# Altium PCB PCB2.PcbDoc
Units mil, origin at the board's own origin, x right, y up, seen from the top; angles counter-clockwise.
Board outline 1705 x 900 mil, 2 copper layers (Top Layer, Bottom Layer); 12 components, 10 nets, 29 pads, 0 vias.
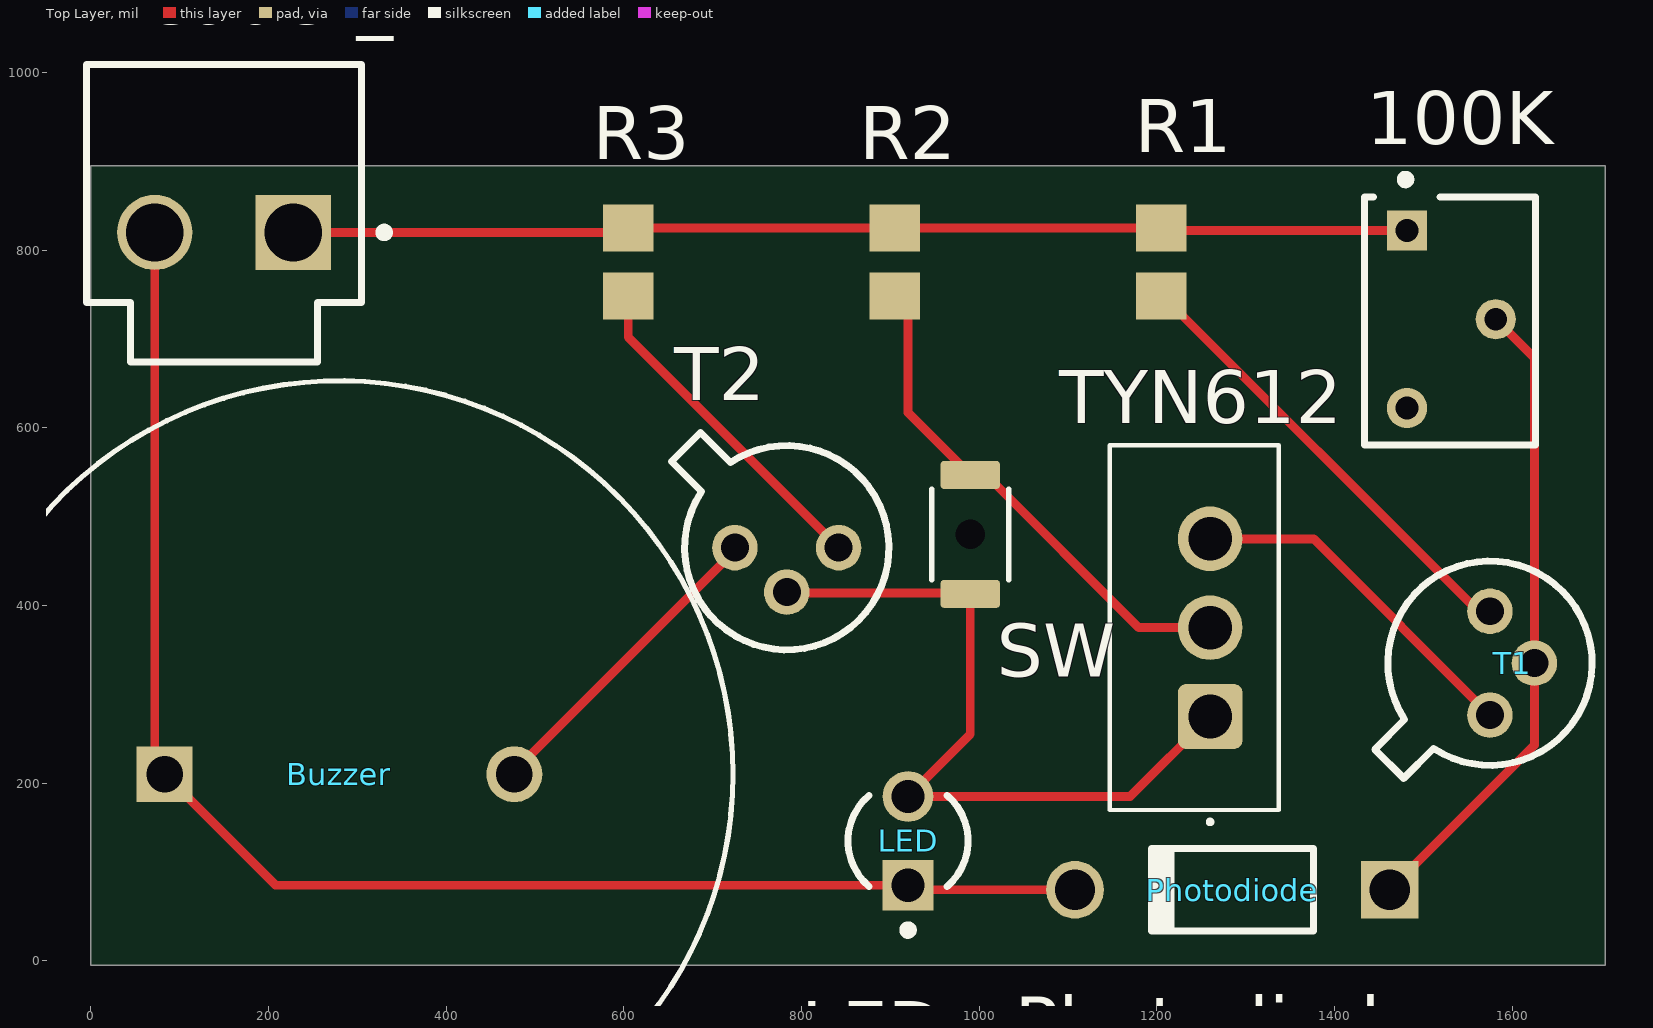
[diagram p0: Top Layer view]
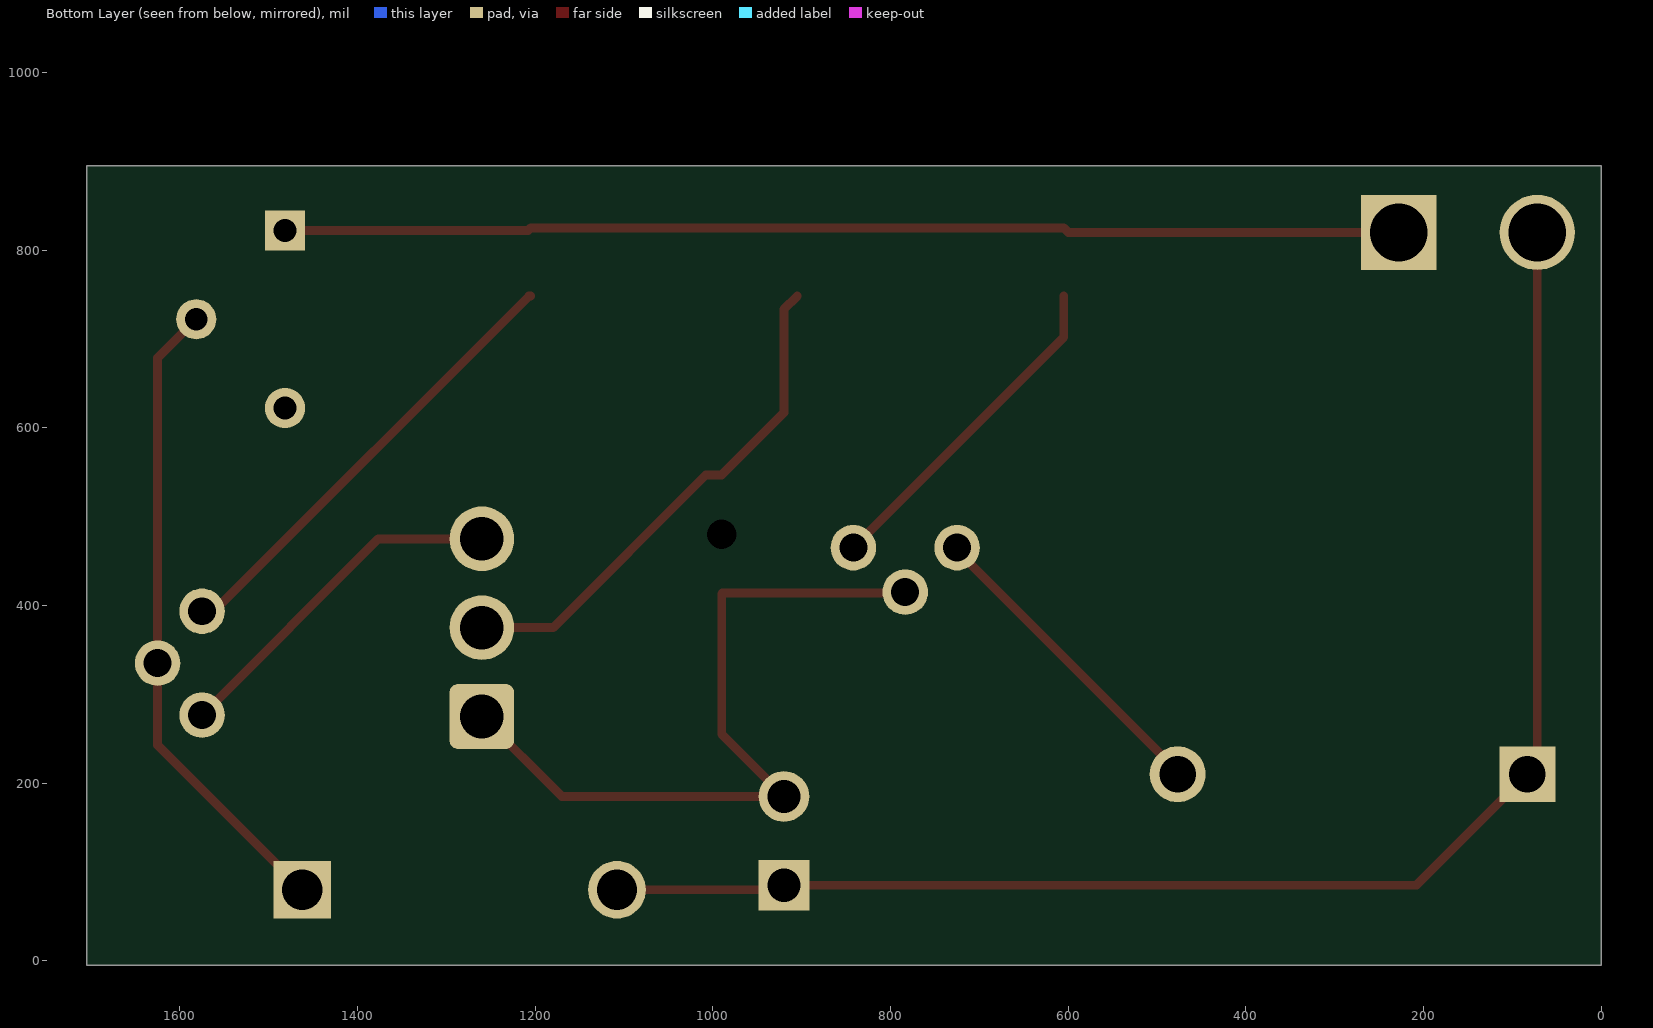
[diagram p1: Bottom Layer view, seen from below]
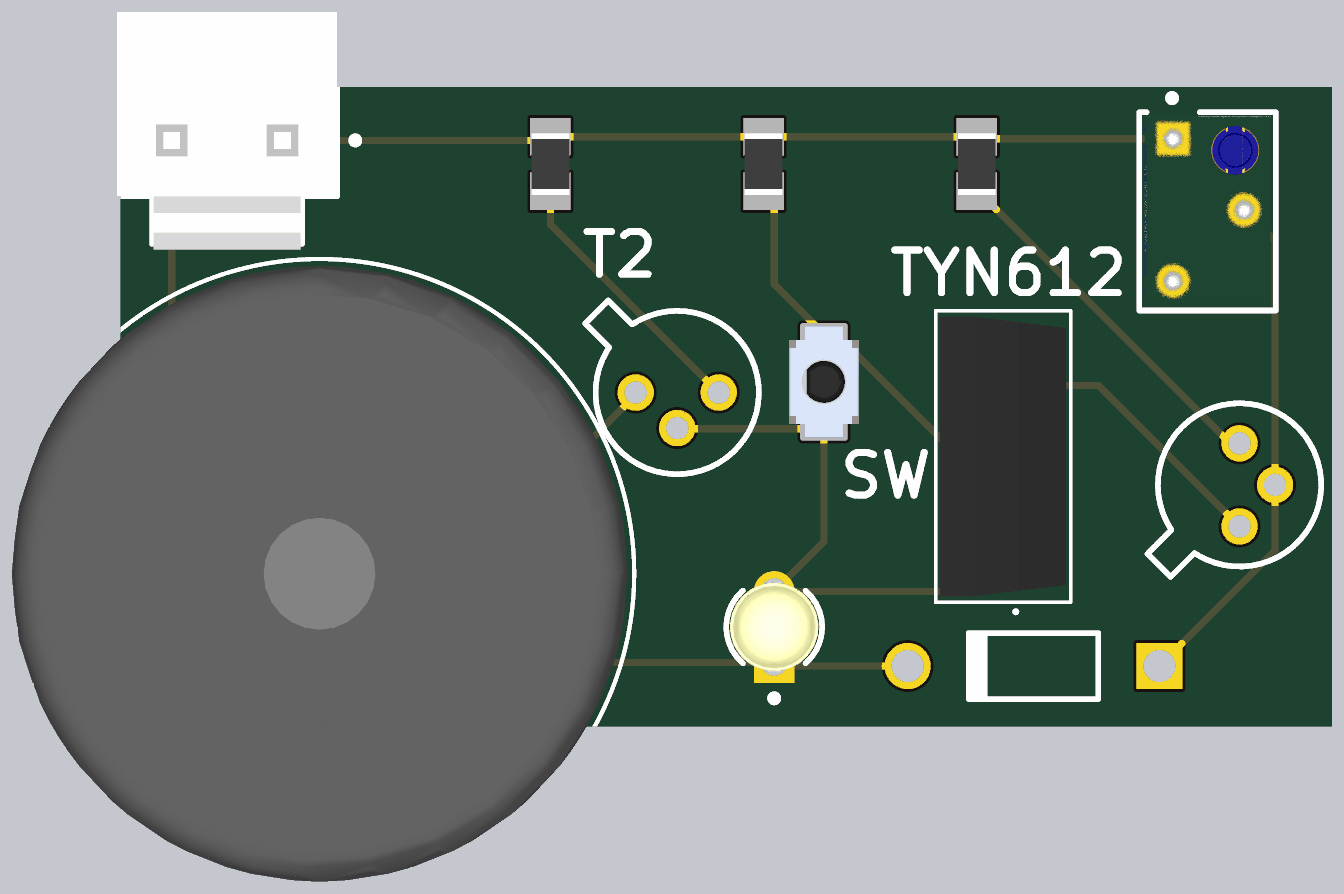
[diagram p2: 3D render of the assembled board from above, using the file's embedded part models]

## Layer stack, top to bottom
Top Solder: solder mask 0.4, Solder Resist, Dk 3.5
Top Layer: signal copper 1.4
Dielectric 1: dielectric 12.6, FR-4, Dk 4.8
Bottom Layer: signal copper 1.4
Bottom Solder: solder mask 0.4, Solder Resist, Dk 3.5

## Board outline
0,-5 1705,-5 1705,895 0,895

## Design rules (kind name [scope] priority, off if disabled: settings)
Clearance [All] p1: gap=10 ignorepadtopadclearanceinfootprint=FALSE
PolygonConnect [All] p1: connectstyle=Relief reliefconductorwidth=10 reliefentries=4 polygonreliefangle="90 Angle" airgapwidth=10
RoutingVias [All] p1: holewidth=28 width=50 viastyle="Through Hole" minholewidth=28 minwidth=50 maxholewidth=28 maxwidth=50
SolderMaskExpansion [All] p1: expansion=4 istentingtop=FALSE
Width [All] p1: maxlimit=10 minlimit=10 preferedwidth=10
30 further rules are at their usual default settings.

## Components (designator, comment, footprint, x,y, rotation, side; value= is the part's Value field where it differs from the comment)
100K "Potentiometer" FP-3266W-MFG 1530,720 r270 top value=100kΩ
Buzzer "Buzzer" FP-PKM22EPPH4001-B0-MFG 280,210 r0 top
Header_2 "B2P-VH(LF)(SN)" JST-B2P-VH(LF)(SN)_V 150,875 r180 top
LED "LED" FP-HLMP-1719-MFG 920,135 r90 top
Photodiode "1N4001" DIOD-DO-41-P-2_V 1285,80 r180 top
R1 "Resistor 1k +/-1% 0805 125 mW" RESC2013X70X40ML20T20 1205,786.61 r90 top value=1k
R2 "Resistor 1k +/-1% 0805 125 mW" RESC2013X70X40ML20T20 905,786.61 r90 top value=1k
R3 "Resistor 1k +/-1% 0805 125 mW" RESC2013X70X40ML20T20 605,786.61 r90 top value=1k
SW "" OMRON-B3U-1000P-2-B_V 990,480 r90 top
T1 "2N2222" MLTC-TO-18-3 1575,335 r90 top
T2 "2N2222" MLTC-TO-18-3 783.46,465 r0 top
TYN612 "TYN612" SIP450W75P254L1000H1920Q3_PRSS0003AF-A_N 1242.28,375 r90 top

## Footprints (in the part's own frame and the unit in brackets; to place one, negate y for a bottom-side part, rotate by r counter-clockwise, add the part's x,y. Pads: shape width x height; smd on the part's side, far side on the other; paste and mask are expansions set on the pad)
DIOD-DO-41-P-2_V [mm] "2-Leads, Axial Lead, Body 4.635x2.36mm, Pin Spacing 9mm"
  rect 1.65x1.65 hole 1.15: 1(-4.5,0)
  round 1.65 hole 1.15: 2(4.5,0)
  silkscreen extent -2.32,-1.18 2.32,1.18, body extent -4.93,-1.18 4.93,1.18, height 2.35
FP-3266W-MFG [mm]
  rect 1.15x1.15 hole 0.65 paste-2539.97 mask+0: 1(-2.595,-1.23)
  round 1.15 hole 0.65 paste-2539.97 mask+0: 2(-0.055,1.31) 3(2.485,-1.23)
  silkscreen extent -4.17,-2.44 3.54,2.44, body extent -3.64,-2.54 3.64,2.54, height 0.25
FP-HLMP-1719-MFG [mm]
  rect 1.45x1.45 hole 0.95 paste-2539.97 mask+0: 1(-1.27,0)
  round 1.45 hole 0.95 paste-2539.97 mask+0: 2(1.27,0)
  silkscreen extent -2.67,-1.71 1.3,1.71, body extent -2.22,-2.22 2.22,2.22, height 0.25
FP-PKM22EPPH4001-B0-MFG [mm]
  rect 1.6x1.6 hole 1.05 paste-2539.97 mask+0: 1(-5,0)
  round 1.6 hole 1.05 paste-2539.97 mask+0: 2(5,0)
  silkscreen extent -11.25,-11.25 11.25,11.25, body extent -11.35,-11.35 11.35,11.35, height 0.25
JST-B2P-VH(LF)(SN)_V [mm] "THD, 2-Leads, Body 8.5x7.86mm, Pitch 3.96mm"
  rect 2.15x2.15 hole 1.65: 1(-1.98,1.4)
  round 2.15 hole 1.65: 2(1.98,1.4)
  silkscreen extent -4.71,-3.4 3.93,5.1, body extent -3.93,-3.2 3.93,5.3, height 10.9
MLTC-TO-18-3 [mm] "TO-18, 3-Leads"
  round 1.3 hole 0.8: 1(-1.485,0) 2(0,-1.27) 3(1.485,0)
  silkscreen extent -3.29,-2.92 2.92,3.29, body extent -3.29,-2.93 2.93,3.29, height 5.33
OMRON-B3U-1000P-2-B_V [mm] "SMT, 2-Leads, Body 3x2.5mm"
  rrect25% 0.8x1.7 smd: 1(-1.7,0) 2(1.7,0)
  round 0 hole 0.85 unplated: H1(0,0)
  silkscreen extent -1.3,-1.1 1.3,1.1, body extent -2,-1.25 2,1.25, height 1.6
RESC2013X70X40ML20T20 [mm] "Chip Resistor, 2-Leads, Body 2.2x1.35mm, IPC Low Density"
  rect 1.35x1.45 smd: 1(-0.975,0) 2(0.975,0)
  body extent -1.1,-0.67 1.1,0.67, height 0.7
SIP450W75P254L1000H1920Q3_PRSS0003AF-A_N [mm] "SIP, Body Width 4.50mm, Lead Width 0.75mm, Pitch 2.54mm, Body Length 10.00mm, Height 19.20mm, IPC Medium Density"
  rrect25% 1.85x1.85 hole 1.25: 1(-2.54,-0.45)
  round 1.85 hole 1.25: 2(0,-0.45) 3(2.54,-0.45)
  silkscreen extent -5.61,-2.41 5.21,2.41, body extent -5,-2.25 5,2.25, height 19.2

## Part data
100K: library part CMP-07234-000016-1, "TRIMMER 100K OHM 0.25W PC PIN TOP", Manufacturer=Bourns, Manufacturer Part Number=3266W-1-103LF, Package=3266W, Power Rating=0.25W, Resistance=0, Temperature="-55°C to +125°C", Temperature Coefficient=100ppm/°C, Temperature Range High=+125°C, Temperature Range Low=-55°C, Tolerance=10%, Automotive=No, Category=Res, ComponentLink2Description=Datasheet, ComponentLink2URL=https://www.bourns.com/docs/Product-Datasheets/3266.pdf, Composition=Cermet, Device Class L1="Passive Components", Device Class L2=Resistors, Device Class L3="Variable Resistors and Potentiometers", Digikey Description="TRIMMER 10K OHM 0.25W PC PIN TOP", Height=9.02mm, Lead Free=Yes, Mouser Description="Trimmer Resistors - Through Hole 1/4 10Kohms 10% SQ W/Standoff Sealed", Octopart=https://octopart.com/3266w-1-103lf-bourns-81445, RoHS=TRUE, Series=3266, Standoff Height=0.43mm
Buzzer: library part CMP-2000-06903-2, "AUDIO PIEZO TRANSDUCER 30V TH", Capacitance=12nF, Frequency=4kHz, Max Operating Temperature=70°C, Max Supply Voltage=25V, Min Operating Temperature=-20°C, Nominal Input Voltage=3V, Package Quantity=900, Diameter=22mm, Height=7mm, Lead Free="Lead Free", Max Frequency=4kHz, Mount="Through Hole", Packaging=Bulk, Radiation Hardening=No, REACH SVHC="No SVHC", Self Resonant Frequency=4kHz, Termination=Solder, Voltage Rating=3V, Washable=No
Header_2: library part CMP-002-00025-2, "Male Header, Pitch 3.96 mm, 1 x 2 Position, Height 10.9 mm, Tail Length 3.7 mm, -25 to 85 degC, RoHS, Bulk", Manufacturer=JST, Max Operating Temperature=85°C, Min Operating Temperature=-25°C, Package Description="Male Header, Pitch 3.96 mm, 1 x 2 Position, Height 10.9 mm, Tail Length 3.7 mm", Case/Package=B2P-VH(LF)(SN), Connector Type=Header, Datasheet URL=http://www.jst-mfg.com/product/pdf/eng/eVH.pdf, Datasheet Version=May-16, Gender=Male, Manufacturer URL=http://www.jst.com/home2.html, Mounting Technology=TH, Package Reference=B2P-VH(LF)(SN), RoHS Compliant=Unknown
LED: library part CMP-2000-06410-2, "LED YELLOW DIFFUSED T-1 T/H", Colour=Yellow, Forward Current=2mA, Forward Voltage=1.8V, Manufacturer=Broadcom, Manufacturer Part Number=HLMP-1719, Package=0, Power Dissipation=17.5mW, Reverse Voltage=5V, Temperature="-40°C to +100°C", Temperature Range High=+100°C, Temperature Range Low=-40°C, Automotive=No, Category=Diode, ComponentLink2Description=Datasheet, ComponentLink2URL=https://docs.broadcom.com/docs/AV02-1557EN, Device Class L1=Optoelectronics, Device Class L2=LEDs, Device Class L3=unset, Digikey Description="LED YELLOW DIFFUSED T-1 T/H", Lead Free=Yes, Led Orientation=Straight, Luminous Intensity=2.1mcd, Mouser Description="Standard LEDs - Through Hole Yellow Diffused 585nm 2.1mcd", Octopart=https://octopart.com/hlmp-1719-broadcom-71130405, RoHS=TRUE, Viewing Angle=50°, Wavelength=585nm
Photodiode: library part CMP-0639-00006-2, "1.0 A Rectifier, 15 pF, 50 V, -65 to 150 degC, 2-Pin DO-41 Plastic, RoHS, Tape and Reel", Manufacturer="Diodes Inc", Max. Average Rectified Current IO (A)=1, Operating Temperature Range (degC)="-65 to 150", ComponentLink1Description="Manufacturer URL", ComponentLink1URL=http://diodes.com/, ComponentLink2Description=Datasheet, ComponentLink2URL=http://diodes.com/datasheets/ds28002.pdf, CT (pF)=15, DatasheetVersion="Rev. 8-2", Max. IFSM (A)=30, Max. IR (uA)=5, Mounting Technology="Through Hole", PackageDescription="2-Pin Axial Lead, Body 4.635 x 2.36 mm, Lead Spread 25.4 mm", PackageReference=DO-41-P-2, Packing="Tape and Reel", PartNumber=1N4001, RoHS=TRUE, VF (V)=1, VRRM (V)=50
R1 R2 R3: library part CMP-009-00010-5, "Chip Resistor, 1 KOhm, +/- 1%, 0.125 W, -55 to 155 degC, 0805 (2013 Metric)", Case/Package=0805, Max Operating Temperature=155°C, Min Operating Temperature=-55°C, Power=125mW, Tolerance=1%, Voltage Rating=150V, Mounting Technology=SM, Pins=2, RoHS Compliant=True
SW: library part CMP-011-00011-3, "Ultra-small Surface-mounting Tactile Switches with High Contact Reliability, SPST-NO, -25 to 70 degC, 2-Pin SMD, RoHS, Tape and Reel", Current Rating=50mA, Voltage Rating=12V, Pins=2, RoHS Compliant=Details
T1 T2: library part CMP-2000-05237-1, "Low Power Bipolar NPN Transistor, 30 V, -65 to 200 degC, 3-Pin TO-18, RoHS, Bulk", Collector Emitter Voltage V(br)ceo=30V, Collector Emitter Voltage Vces=400mV, Continuous Collector Current Ic Max=800mA, Current Ic @ Vce Sat=150mA, DC Current Gain hFE=100, Full Power Rating Temperature=25degC, Manufacturer=Multicomp, Package / Case=TO-18, Package Description="3-Pin Transistor Outline Package (TO-18), Dia 5.54 mm, Pitch Pitch 1.485mm", Package Reference=TO-18-3, Power Dissipation Pd=500mW, Voltage Vcbo=60V, Current Ic Continuous a Max=800mA, Current Ic hFE=150mA, Datasheet URL=http://www.farnell.com/datasheets/1662272.pdf, Datasheet Version="Rev. 1.1, 05/2012", DC Collector Current=800mA, Gain Bandwidth ft Min=250MHz, Gain Bandwidth ft Typ=250MHz, Hfe Min=100, Manufacturer URL=http://uk.farnell.com/b/multicomp, No. of Pins=3, No. of Transistors=1, Pin Configuration=a, Power Dissipation Ptot Max=500mW, SVHC=NoSVHC(19-Dec-2012), Transistor Case Style=TO-18, Transistor Polarity=NPN
TYN612: library part CMP-00572-20478059-1, "Silicon Controlled Rectifier, 12A I(T)RMS, 12000mA I(T), 600V V(DRM), 600V V(RRM), 1 Element, TO-220AB", Case/Package=TO-220-3, Hold Current=15mA, Manufacturer Lifecycle Status="LAST TIME BUY", Max Operating Temperature=150°C, Max Repetitive Reverse Voltage (Vrrm)=600V, Min Operating Temperature=-40°C, RMS Current (Irms)=18.8A, China RoHS=Compliant, ComponentLink1Description="Manufacturer's Website", ComponentLink1URL=http://www.renesas.com, ComponentLink2Description="Datasheet URL", ComponentLink2URL=https://octopart.com/cad-content/api/get-model-datasheet/15189/20478059, ComponentLink3Description="Manufacturer's Package Drawing", ComponentLink3URL=https://www.renesas.com/en/document/psc/package-drawing-220fl-3pin-prss0003af, Height=3mm, HelpURL=https://octopart.com/cad-content/api/get-model-datasheet/15189/20478059, Lifecycle Status=EOL, Mount="Through Hole", Number of Pins=3, RoHS=Compliant

## Nets (pads, with @x,y where several pads share a name; then routed paths per layer and width w, separated by ;. In a path a pad name is that pad's centre, name@x,y a point inside that pad or via, vN(x,y) a via of type N, cw(c..) or ccw(c..) an arc to the next point about the centre after c; other vN are vias at no path point)
Net100K_1: 100K.1 Header_2.1 R1.2 R2.2 R3.2 | length 1256.9
  Top Layer w10: Header_2.1 599.88,819.88 R3.2 R2.2 R1.2 1207.83,822.17 100K.1
Net100K_2: 100K.2 Photodiode.1 T1.2 | length 727.6
  Top Layer w10: Photodiode.1 1625,242.83 T1.2 1625,678.74 100K.2
NetBuzzer_1: Buzzer.1 Header_2.2 LED.1 Photodiode.2 | length 1693
  Top Layer w10: Header_2.2 72.05,221.1 Buzzer.1 208.15,85 LED.1 925,80 Photodiode.2
NetBuzzer_2: Buzzer.2 T2.1 | length 357.8
  Top Layer w10: Buzzer.2 476.85,213.43 725,461.57 T2.1
NetHeader_1_2: 
NetLED_2: LED.2 SW.1 T2.2 TYN612.1 | length 841.7
  Top Layer w10: T2.2 784.43,414.04 989.04,414.04 SW.1 990,255 LED.2 1170,185 TYN612.1
NetR1_1: R1.1 T1.3 | length 516.9
  Top Layer w10: R1.1 1206.97,748.23 1553.85,401.34 1567.12,401.34 T1.3
NetR2_1: R2.1 SW.2 TYN612.2 | length 577.7
  Top Layer w10: R2.1 920,733.23 920,616.93 SW.2 1007.72,546.93 1179.65,375 TYN612.2
NetR3_1: R3.1 T2.3 | length 381.4
  Top Layer w10: R3.1 605,701.93 T2.3
NetT1_1: T1.1 TYN612.3 | length 397.2
  Top Layer w10: TYN612.3 1376.54,475 T1.1
pads on no net: 100K.3 SW.H1